# Altium PCB Final decision exp V2.PcbDoc
Units mm, origin at the board's own origin, x right, y up, seen from the top; angles counter-clockwise.
Board outline 49.4 x 66.4 mm, 2 copper layers (Top Layer, Bottom Layer); 66 components, 62 nets, 265 pads, 44 vias.
Unrouted connection lines stored in the file: 140.
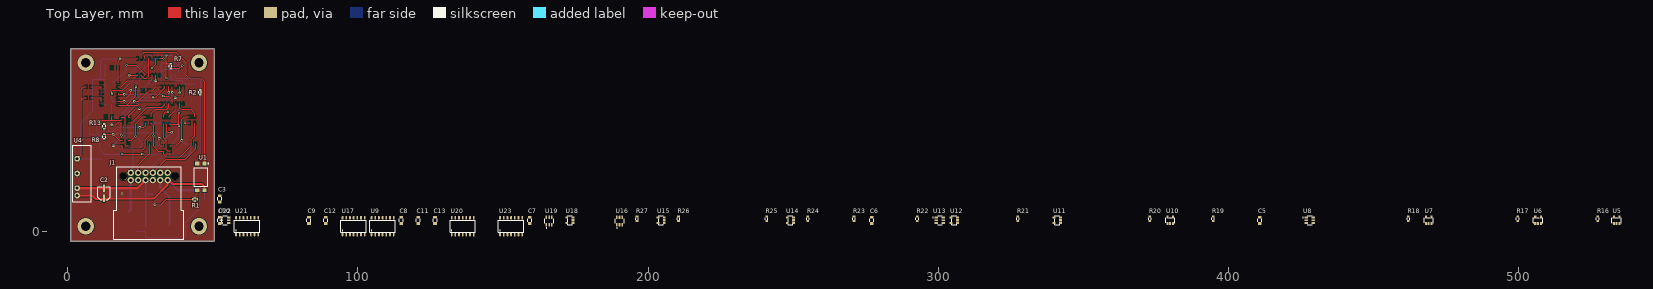
[diagram p0: Top Layer view]
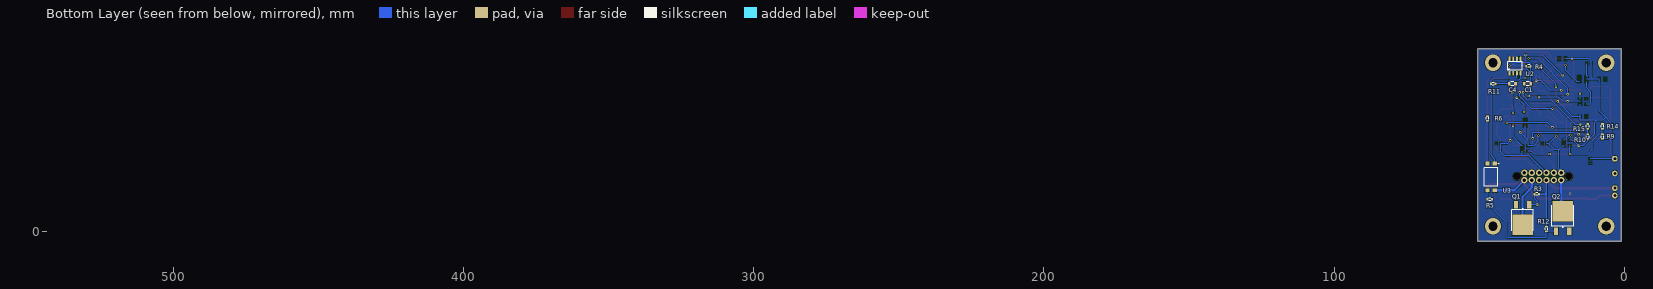
[diagram p1: Bottom Layer view, seen from below]

## Layer stack, top to bottom
Top Solder: solder mask 0.0102, Solder Resist, Dk 3.5
Top Layer: signal copper 0.0356
Dielectric 1: dielectric 0.32, FR-4, Dk 4.8
Bottom Layer: signal copper 0.0356
Bottom Solder: solder mask 0.0102, Solder Resist, Dk 3.5

## Board outline
1,-3.4 1,63 50.4,63 50.4,-3.4

## Design rules (kind name [scope] priority, off if disabled: settings)
AcuteAngle [All] p1: minimum=3.50000000000000E+0001 checktracksonly=FALSE
BoardOutlineClearance "BoardOutlineClearance 1" [All] p1: gap=0.25 ignorepadtopadclearanceinfootprint=FALSE except(0: Arc-SplitContinuation Track-SplitContinuation SMDPad-SplitContinuation THPad-SplitContinuation Via-SplitContinuation Fill-SplitContinuation Poly-SplitContinuation Region-SplitContinuation Text-SplitContinuation) // Milling
Clearance "Clearance-1 1/2 Oz" [All] p1: gap=0.125 ignorepadtopadclearanceinfootprint=FALSE except(0.2: Arc-Fill Arc-Poly Track-Fill Track-Poly SMDPad-SMDPad SMDPad-Fill SMDPad-Poly THPad-Fill THPad-Poly Via-Fill Via-Poly Fill-Fill Fill-Poly Poly-Poly Poly-Region Poly-Text; 0.25: Arc-Hole Track-Hole SMDPad-Hole THPad-Hole Via-Hole Fill-Hole Poly-Hole Region-Hole Text-Hole) // Standart
ComponentClearance [All] p1: gap=0.1 collisioncheckmode=3 verticalgap=0.1 showdistances=FALSE
DiffPairsRouting "DiffPairsRouting 1/2 Oz" [All] p1: maxlimit=0.254 minlimit=0.125 mostfreqgap=0.254 toplayer_minwidth=0.125 toplayer_maxwidth=0.381 toplayer_prefwidth=0.381 bottomlayer_minwidth=0.125 bottomlayer_maxwidth=0.381 bottomlayer_prefwidth=0.381 maxuncoupledlength=12.7
HoleSize "Minimum HoleSize" [IsPad] p1: absolutevalues=TRUE maxlimit=5.9 minlimit=0.6 maxpercent=80.000 minpercent=20.000
HoleSize "Minimum HoleSize VIA 1" [IsVia] p2: absolutevalues=TRUE maxlimit=5.9 minlimit=0.3 maxpercent=80.000 minpercent=20.000 // Standart
HoleToHoleClearance Hole2HoleClearance [All] p1: gap=0.25 allowstackedmicrovias=FALSE
MinimumAnnularRing "Minimum AR VIA Standart" [All] p1: minimumring=0.15
MinimumAnnularRing "Minimum AR PAD Standart" [All] p2: minimumring=0.2
MinimumSolderMaskSliver "SolderMask Bridge Standart" [All] p1: minsoldermaskwidth=0.15 // All Masks
PlaneClearance "PlaneClearance-1 1/2 Oz" [All] p1: clearance=0.2 // Standart
PlaneConnect "TermalConnect-1 1/2 Oz" [All] p1: planeconnectstyle=Relief reliefexpansion=0.2 reliefentries=4 reliefconductorwidth=0.2 reliefairgap=0.2 // Standart
PolygonConnect "PolygonConnect-1 1/2 Oz" [All] p1: thpad.connectstyle=Relief thpad.reliefconductorwidth=0.15 thpad.reliefentries=4 thpad.polygonreliefangle="90 Angle" thpad.airgapwidth=0.2 smdpad.connectstyle=Relief smdpad.reliefconductorwidth=0.2 smdpad.reliefentries=4 smdpad.polygonreliefangle="90 Angle" smdpad.airgapwidth=0.2 via.connectstyle=Direct via.reliefconductorwidth=0.254 via.reliefentries=4 via.polygonreliefangle="90 Angle" via.airgapwidth=0.254 // Standart
RoomDefinition Reciever [InComponentClass('Reciever')] p1: confinementstyle=ConfineIn formatcopy=TRUE lockcomponents=FALSE outline 51.5,-1.927 536.499,-1.927 536.499,8.273 51.5,8.273
RoomDefinition "Sheet1 V2" [InComponentClass('Sheet1 V2')] p2: confinementstyle=ConfineIn formatcopy=TRUE lockcomponents=FALSE outline 10.2,28.8 30.125,28.8 30.125,41.575 10.2,41.575
RoutingCorners [All] p1 off: cornerstyle=45-Degree minsetback=2.54 maxsetback=2.54
RoutingVias [All] p1: holewidth=0.4 width=0.8 viastyle="Through Hole" minholewidth=0.3 minwidth=0.6 maxholewidth=5.9 maxwidth=8.9
SilkToSilkClearance Silk2SilkClearance [All] p1 off: silktosilkclearance=0.15
SilkToSolderMaskClearance Silk2SolderMaskClearance [IsPad] p1 off: minsilkscreentomaskgap=0.15 clearancetoexposedcopper=TRUE
SolderMaskExpansion SolderMaskExpansion-1 [All] p1: expansion=0.05 istentingtop=FALSE // Standart
UnRoutedNet [All] p1: checkbadconnections=TRUE
Width [InNet('24V')] p1: maxlimit=1 minlimit=0.5 preferedwidth=0.75
Width Width_1 [InNet('GND_24V')] p2: maxlimit=1 minlimit=0.5 preferedwidth=0.75
Width "Width 1/2 Oz" [All] p3: maxlimit=10 minlimit=0.125 preferedwidth=0.254 checkconnectedcopper=TRUE
19 further rules are at their usual default settings.

## Classes and differential pairs
net class Sgn_Out[1..3]: Sgn_Out1 Sgn_Out2 Sgn_Out3
net class Sgn_In[1..3]: NetR21_2 NetR27_2 Sgn_In1
component class Reciever: C5 C6 C7 C8 C9 C10 C11 C12 C13 R16 R17 R18 R19 R20 R21 R22 R23 R24 R25 R26 R27 U5 U6 U7 U8 U9 U10 U11 U12 U13 U14 U16 U17 U18 U20 U21 U22 U23
component class "Sheet1 V2": 23 C1 C2 C3 C4 J1 J2 Q1 Q2 R1 R2 R3 R4 R5 R6 R7 R8 R9 R10 R11 R12 R13 R14 R15 U1 U2 U3 U4

## Components (designator, comment, footprint, x,y, rotation, side; value= is the part's Value field where it differs from the comment)
C1 "Cap 10nF (0805)" "0805 Capicator" 33.29,50.9 r0 bottom (schematic designator C2)
C2 "Cap Pol 4.7uF" "Bar Cap 4x5.4" 12.45,14.925 r0 top (schematic designator C1)
C3 "4.7uF" "0805 Capicator" 52.4,11.273 r90 top
C4 "Cap 10nF (0805)" "0805 Capicator" 38.575,50.9 r0 bottom
C5 "0.1uF" "0805 Capicator" 410.899,3.873 r90 top
C6 "0.1uF" "0805 Capicator" 277.099,3.873 r90 top
C7 "0.1uF" "0805 Capicator" 159.2,3.873 r90 top
C8 "0.1uF" "0805 Capicator" 114.9,3.873 r90 top (schematic designator C10)
C9 "0.1uF" "0805 Capicator" 83.1,3.873 r90 top (schematic designator C12)
C10 "0.1uF" "0805 Capicator" 52.4,3.873 r90 top (schematic designator C15)
C11 "0.1uF" "0805 Capicator" 120.8,3.873 r90 top (schematic designator C8)
C12 "0.1uF" "0805 Capicator" 88.9,3.873 r90 top (schematic designator C11)
C13 "0.1uF" "0805 Capicator" 126.6,3.873 r90 top (schematic designator C9)
J1 "Conn6x2" Conn6x2(Molex) 19.16,18.97 r0 top
Q1 "MOSFET-N" "D-Pak (TO-252AA)" 35,9.2 r0 bottom
Q2 "MOSFET-N" "D-Pak (TO-252AA)" 21.2,0.1 r180 bottom
R1 "16k" "0603 Resistor" 43.8,11.1 r180 top
R2 "1k" "0603 Resistor" 45.6,48 r270 top
R3 "8.2k" "0603 Resistor" 30.1,12.898 r0 bottom
R4 "22k" "0603 Resistor" 32.97,57 r180 bottom (schematic designator R7)
R5 "16k" "0603 Resistor" 46.34,11.08 r180 bottom (schematic designator R11)
R6 "1k" "0603 Resistor" 47.12,38.975 r270 bottom (schematic designator R12)
R7 "5.6" "0603 Resistor" 35.441,57 r270 top (schematic designator R13)
R8 "1k" "0603 Resistor" 12.55,32.72 r90 top (schematic designator R4)
R9 "2k" "0603 RESISTOR" 7.475,32.72 r270 bottom (schematic designator R5)
R10 "3k" "0603 RESISTOR" 12.55,32.72 r270 bottom (schematic designator R6)
R11 "22k" "0603 Resistor" 45.1,50.9 r0 bottom (schematic designator R14)
R12 "8.2k" "0603 Resistor" 26.78,0.88 r270 bottom (schematic designator R15)
R13 "3k9" "0603 RESISTOR" 12.55,36.24 r270 top (schematic designator R8)
R14 "3k" "0603 RESISTOR" 7.475,36.24 r270 bottom (schematic designator R9)
R15 "2k" "0603 Resistor" 12.55,36.24 r270 bottom (schematic designator R10)
R16 "1k" "0603 Resistor" 527.399,4.373 r90 top
R17 "1k" "0603 Resistor" 499.799,4.373 r90 top
R18 "1k" "0603 Resistor" 462.099,4.373 r90 top
R19 "1k" "0603 Resistor" 394.799,4.373 r90 top
R20 "1k" "0603 Resistor" 372.999,4.373 r90 top
R21 "1k" "0603 Resistor" 327.499,4.373 r90 top
R22 "10k" "0603 Resistor" 292.799,4.373 r90 top
R23 "10k" "0603 Resistor" 270.999,4.373 r90 top
R24 "10k" "0603 Resistor" 255.099,4.373 r90 top
R25 "1k" "0603 Resistor" 240.899,4.373 r90 top
R26 "10k" "0603 Resistor" 210.5,4.373 r90 top
R27 "1k" "0603 Resistor" 196.2,4.373 r90 top
U1 "Opt" FAIR-MDIP-4_V 45.85,18.8 r270 top
U2 "NE555P" SOIC-8 39.52,54.55 r90 bottom (schematic designator U3)
U3 "Opt" FAIR-MDIP-4_V 45.85,18.8 r270 bottom (schematic designator U4)
U4 "DC/DC" SIP7 3.225,12.385 r180 top (schematic designator U2)
U5 "Comparator" SOT-23-5 533.899,2.773 r0 top
U6 "Comparator" SOT-23-5 506.799,2.773 r0 top (schematic designator U8)
U7 "Comparator" SOT-23-5 469.099,2.773 r0 top (schematic designator U10)
U8 "Inv" SOT236 428.099,3.873 r0 top (schematic designator U6)
U9 "2AND" SOIC-14 104.7,-1.027 r0 top (schematic designator U7)
U10 "Comparator" SOT-23-5 379.999,2.773 r0 top (schematic designator U12)
U11 "Comparator" SOT-23-5 342.199,3.873 r90 top (schematic designator U16)
U12 "Comparator" SOT-23-5 306.699,3.873 r90 top (schematic designator U18)
U13 "Inv" SOT236 300.599,3.873 r0 top
U14 "Comparator" SOT-23-5 250.199,3.873 r90 top (schematic designator U20)
U15 "Comparator" SOT-23-5 205.6,3.873 r90 top (schematic designator U22)
U16 "Inv" SOT236 190.2,3.573 r90 top (schematic designator U21)
U17 "2AND" SOIC-14 94.7,-1.027 r0 top (schematic designator U14)
U18 "Comparator" SOT-23-5 174.2,3.873 r90 top (schematic designator U23)
U19 "Inv" SOT236 165.9,3.573 r90 top (schematic designator U17)
U20 "4AND" SOIC-14 132.3,-1.027 r0 top (schematic designator U11)
U21 "4AND" SOIC-14 58,-1.027 r0 top (schematic designator U15)
U22 "Inv" SOT236 54.2,3.873 r0 top (schematic designator U19)
U23 "2XOR" SOIC-14 149,-1.027 r0 top (schematic designator U9)

## Footprints (in the part's own frame and the unit in brackets; to place one, negate y for a bottom-side part, rotate by r counter-clockwise, add the part's x,y. Pads: shape width x height; smd on the part's side, far side on the other; paste and mask are expansions set on the pad)
"0603 Resistor" [mm]
  rect 0.6x0.9 smd: 1(-0.78,0) 2(0.78,0)
  silkscreen extent -0.35,-0.45 0.35,0.45, body extent -0.85,-0.45 0.85,0.45, height 0.55
"0603 RESISTOR" [mm]
  rect 0.6x0.9 smd: 1(-0.78,0) 2(0.78,0)
  silkscreen extent -0.35,-0.45 0.35,0.45, body extent -0.85,-0.45 0.85,0.45, height 0.55
"0805 Capicator" [mm]
  rect 0.9x1.3 smd: 1(-1.1,0) 2(1.1,0)
  silkscreen extent -0.53,-0.67 0.53,0.67, body extent -1.05,-0.67 1.05,0.68, height 0.75
"Bar Cap 4x5.4" [mm]
  rect 0.8x2.5 smd: 1(0,0) 2(0,-3.5)
  silkscreen extent -2.2,-4 2.25,0.43, body extent -2.15,-4.3 2.15,0.7, height 5.4
Conn6x2(Molex) [mm]
  round 2.2 hole 1.2: 1(2.54,1.27) 2(5.08,1.27) 3(7.62,1.27) 4(10.16,1.27) 5(12.7,1.27) 6(15.24,1.27) 7(2.54,-1.27) 8(5.08,-1.27) 9(7.62,-1.27) 10(10.16,-1.27) 11(12.7,-1.27) 12(15.24,-1.27)
  round 2.6 hole 2.6 unplated: A(0,0) A(17.78,0)
  silkscreen extent -3.25,-21.63 20.87,3.37, body extent -3.15,-31.93 20.79,3.23, height 22.06
"D-Pak (TO-252AA)" [mm]
  rect 1.5x2.5 smd: 1(-2.3,0) 3(2.3,0)
  rect 7x7 smd: 2(0,6.9)
  silkscreen extent -3.72,1.02 3.75,8.87, body extent -3.38,-0.65 3.35,9.45, height 2.37
FAIR-MDIP-4_V [mm]
  rect 1.3x1.5 smd: 1(-4.6,1.27) 2(-4.6,-1.27) 3(4.6,-1.27) 4(4.6,1.27)
  silkscreen extent -4.72,-2.3 3.25,2.7, body extent -5.08,-2.3 5.08,2.3, height 3.85
SIP7 [mm]
  round 2 hole 1: 1(0,0) 2(0,-2.54) 4(0,-7.62) 6(0,-12.7)
  silkscreen extent -4.77,-17.35 1.45,2.1, body extent -4.7,-17.27 1.39,2.03, height 10.16
SOIC-8 [mm]
  oval 1.6x0.65 smd: 1(0,0) 2(0,-1.27) 3(0,-2.54) 4(0,-3.81) 5(5,-3.81) 6(5,-2.54) 7(5,-1.27) 8(5,0)
  silkscreen extent 1.1,-4.35 3.9,0.55, body extent -0.36,-4.35 5.41,0.55, height 1.45
SOIC-14 [mm]
  oval 0.6x1.3 smd paste+0 mask+0.1: 1(0,0) 2(1.27,0) 3(2.54,0) 4(3.81,0) 5(5.08,0) 6(6.35,0) 7(7.62,0) 8(7.62,5.75) 9(6.35,5.75) 10(5.08,5.75) 11(3.81,5.75) 12(2.54,5.75) 13(1.27,5.75) 14(0,5.75)
  silkscreen extent -0.55,0.82 8.15,4.92, body extent -0.52,-0.12 8.13,5.87, height 1.75
SOT236 [mm]
  rrect25% 1.21x0.58 smd: 1(-1.255,0.95) 2(-1.255,0) 3(-1.255,-0.95) 4(1.255,-0.95) 5(1.255,0) 6(1.255,0.95)
  silkscreen extent -2.4,-1.56 0.8,1.56, body extent -1.4,-1.45 1.4,1.45, height 1.45
SOT-23-5 [mm]
  rect 0.7x1 smd mask+0.045: 1(-0.95,0) 2(0,0) 3(0.95,0) 4(0.95,2.2) 5(-0.95,2.2)
  silkscreen extent -1.6,0.3 1.6,1.92, body extent -1.5,-0.15 1.5,2.35, height 1.1

## Part data
C1 C4: library part CMP-020-0006-1, "0805 X7R 10nF 100V 10%", Manufacturer="Murata Manufacturing", Part Number=GRM21BR72A103KA01L, Component Type=Standard, ComponentLink1Description=Chip&Dip, ComponentLink1URL=https://www.chipdip.ru/product/grm21br72a103ka01l, Design Item ID="Cap 10nF (0805)", Pins=2, Source=Karen_Components.SchLib, Type=Capacitor
C2: library part CMP-020-0029-1, "ECAP SMD,  35V, 105°C", Manufacturer=Epcos, Part Number=B41121A7475M000, Component Type=Standard, ComponentLink1Description=Chip&Dip, ComponentLink1URL=https://www.chipdip.ru/product/b41121a7475m000, Design Item ID="Cap Pol 4.7uF", Pins=2, Source=Karen_Components.SchLib, Type=Capacitor
C3: library part "Cap 4.7uF (0805)", "4.7uF X5R 10% 25V 0805", Manufacturer="Murata Manufacturing", Part Number=GRM21BR61E475KA12L, ComponentLink1Description=Chip&Dip, ComponentLink1URL=https://www.chipdip.ru/product/grm21br61e475ka12l, Type=Capacitor
C5 C6 C7 C8 C9 C10 C11 C12 C13: library part "Cap 0.1uF (0805)", "0.1uF X7R 50V 10% 0805", Manufacturer="Murata Manufacturing", Part Number=GRM21BR71E104KA01L, ComponentLink1Description=Chip&Dip, ComponentLink1URL=https://www.chipdip.ru/product/grm21br71e104ka01l, Type=Capacitor
J1: library part "Conn 12 [Stack64]", "Stac64 Right-Angle Header Assembly, 12 Circuits, Polarization A, Black, Tray / Current - Maximum per Contact 10.0A / Voltage - Maximum 500V", ComponentLink1Description=Molex, ComponentLink1URL=https://www.molex.com/molex/products/part-detail/pcb_headers/0346910120, ComponentLink2Description=DataSheet, ComponentLink2URL=https://www.molex.com/webdocs/datasheets/pdf/en-us/0346910120_PCB_HEADERS.pdf
Q1 Q2: library part "MOSFET-N [IRLR]", "Trans MOSFET N-CH Si 55V 89A 3-Pin(2+Tab) DPAK Tube", Manufacturer="International Rectifier", Part Number=IRLR3705ZTRPBF, ComponentLink1Description=DataSheet, ComponentLink1URL=https://static.chipdip.ru/lib/292/DOC000292789.pdf, ComponentLink2Description=Chip&Dip, ComponentLink2URL=https://www.chipdip.ru/product/irlr3705zpbf, Type=Transistor
R1 R5: library part "Res 16k (0603)", "0.1W 0603 16k, 1%", Manufacturer=Taiwan, Part Number=RC0603FR-0716KL, ComponentLink1Description=Chip&Dip, ComponentLink1URL=https://www.chipdip.ru/product0/9000079741, ComponentLink2Description=Datasheet, ComponentLink2URL=https://static.chipdip.ru/lib/788/DOC004788200.pdf
R2 R6 R8 R16 R17 R18 R19 R20 R21 R25 R27: library part "Res 1k (0603)", "0.1W 0603 1k, 1%", Manufacturer=Taiwan, Part Number=RC0603FR-071KL, ComponentLink1Description=Chip&Dip, ComponentLink1URL=https://www.chipdip.ru/product0/9000079676, Type=Resistor
R3 R12: library part "Res 8.2k (0603)", "0.1W 0603 8.2k, 1%", Manufacturer=Taiwan, Part Number=RC0603FR-078R2L, ComponentLink1Description=Chip&Dip, ComponentLink1URL=https://www.chipdip.ru/product0/9000079556, ComponentLink2Description=Datasheet, ComponentLink2URL=ttps://static.chipdip.ru/lib/788/DOC004788200.pdf
R4 R11: library part "Res 22k (0.1W 0603 22k, 1%)", "0.1W 0603 22k, 1%"
R7: library part "Res 5.6k (0.1W 0603 5.6k, 1%)", "0.1W 0603 5.6k, 1%"
R9 R15: library part "Res 2k (0603)", "0.1W 0603 2k, 1%", Manufacturer=Taiwan, Part Number=RC0603FR-072KL, ComponentLink1Description=Chip&Dip, ComponentLink1URL=https://www.chipdip.ru/product0/9000079719, Type=Resistor
R10 R14: library part "Res 3k (0603)", "0.1W 0603 3k, 1%", Manufacturer=Taiwan, Part Number=RC0603FR-073KL, ComponentLink1Description=Chip&Dip, ComponentLink1URL=https://www.chipdip.ru/product0/9000079723, Type=Resistor
R13: library part "Res 3.9k (0603)", "0.1W 0603 3.9k, 1%", Manufacturer=Taiwan, Part Number=RC0603FR-073K9L, ComponentLink1Description=Chip&Dip, ComponentLink1URL=https://www.chipdip.ru/product0/9000079726, Type=Resistor
R22 R23 R24 R26: library part "Res 10k (0603)", "0.1W 0603 10k, 1%", Manufacturer=Taiwan, Part Number=RC0603FR-0710KL, ComponentLink1Description=Chip&Dip, ComponentLink1URL=https://www.chipdip.ru/product0/9000079736, Type=Resistor
U1 U3: library part "Optocoupler [FOD817B]", "Phototransistor Optocoupler, 4 us Rise, 3 us Fall, 5000 Vrms, -55 to 110 degC, 4-Pin MDIP, RoHS, Tape and Reel", Manufacturer="ON Semiconductor", Part Nomber=FOD817B, ComponentLink1Description=Chip&Dip, ComponentLink1URL=https://www.chipdip.ru/product/fod817b, ComponentLink2Description=DataSheet, ComponentLink2URL=https://static.chipdip.ru/lib/297/DOC000297284.pdf
U2: "Standard Timer Single 8-Pin PDIP Tube", Case/Package=PDIP, Current Rating=10mA, Frequency=500kHz, High Level Output Current=-200mA, Low Level Output Current=200mA, Manufacturer="Texas Instruments", Max Operating Temperature=70°C, Max Supply Voltage=16V, Min Operating Temperature=0°C, Min Supply Voltage=4.5V, Nominal Supply Current=2mA, Operating Supply Voltage=5V, Package Quantity=50, Quiescent Current=15mA, Category="Clock and Timing", ComponentLink1Description=https://datasheet.ciiva.com/1139/sa555-1139904.pdf?src-supplier=Element14, ComponentLink1URL=https://datasheet.ciiva.com/1139/sa555-1139904.pdf?src-supplier=Element14, ComponentLink2Description=https://datasheet.ciiva.com/19457/904085-19457361.pdf?src-supplier=Jameco, ComponentLink2URL=https://datasheet.ciiva.com/19457/904085-19457361.pdf?src-supplier=Jameco, ComponentLink3Description=https://datasheet.ciiva.com/26325/152184-da-01-en-ne555p-timer-tid-26325915.pdf?src-supplier=Conrad, ComponentLink3URL=https://datasheet.ciiva.com/26325/152184-da-01-en-ne555p-timer-tid-26325915.pdf?src-supplier=Conrad, ComponentLink4Description=https://datasheet.ciiva.com/1147/1764032-1147750.pdf?src-supplier=Newark, ComponentLink4URL=https://datasheet.ciiva.com/1147/1764032-1147750.pdf?src-supplier=Newark, ComponentLink5Description=https://datasheet.ciiva.com/14094/ne555-series-eng-tds-14094950.pdf?src-supplier=Distrelec, ComponentLink5URL=https://datasheet.ciiva.com/14094/ne555-series-eng-tds-14094950.pdf?src-supplier=Distrelec, ComponentLink6Description=https://datasheet.ciiva.com/14274/ne555-14274456.pdf?src-supplier=Avnet, ComponentLink6URL=https://datasheet.ciiva.com/14274/ne555-14274456.pdf?src-supplier=Avnet, ComponentLink7Description=https://datasheet.ciiva.com/15152/getdatasheetpartid-248510-15152620.pdf?src-supplier=Verical, ComponentLink7URL=https://datasheet.ciiva.com/15152/getdatasheetpartid-248510-15152620.pdf?src-supplier=Verical, ComponentLink8Description=https://datasheet.ciiva.com/1233/ne555-1233454.pdf?src-supplier=Digi-Key, ComponentLink8URL=https://datasheet.ciiva.com/1233/ne555-1233454.pdf?src-supplier=Digi-Key, ComponentLink9Description=https://datasheet.ciiva.com/26228/ne555-26228892.pdf?src-supplier=Avnet+Europe, ComponentLink9URL=https://datasheet.ciiva.com/26228/ne555-26228892.pdf?src-supplier=Avnet+Europe, Contact Plating=Gold, Height=4.57mm, Lead Free="Lead Free", Length=9.81mm, Manufacturer Part Number=NE555P, Mount=SMD, Number of Pins=8, Number of Timers/Counters=1, Operating Supply Current=10mA, Packaging=Rail/Tube, Pricing 1="1=0,37000, 10=0,29900, 25=0,27360, 100=0,20350, 250=0,18444, 500=0,15264, 1000=0,11448, 2500=0,10494, 5000=0,10020 (USD)", Radiation Hardening=No, REACH SVHC="No SVHC", RoHS=Yes, RoHS Compliant=Yes, Supplier 1=Digi-Key, Weight=0.015535oz, Width=6.35mm
U4: library part "DC/DC Isolated 5V [TMH]", "The TMH series are ultra miniature, isolated 2 Watt DC/DC-converters in a Single-in-Line  package  (SIP)", Manufacturer="Traco Power", Part Number=TMH2405S, ComponentLink1Description=Chip&Dip, ComponentLink1URL=https://www.chipdip.ru/product/tmh-2405s, ComponentLink2Description=DataSheet, ComponentLink2URL=https://static.chipdip.ru/lib/005/DOC001005854.pdf, Type=IC
U5 U6 U7 U10 U11 U12 U14 U15 U18: library part "Comparator [LMV]", "LMV7219 7-ns 2.7-V to 5-V Comparator with Rail-to-Rail Output", Manufacturer="Texas Instruments", Part Number=LMV7219M5X/NOPB, ComponentLink1Description=DataSheet, ComponentLink1URL=http://www.ti.com/lit/ds/symlink/lmv7219.pdf, ComponentLink2Description=Mouser, ComponentLink2URL=https://ru.mouser.com/ProductDetail/Texas-Instruments/LMV7219M5X-NOPB?qs=sGAEpiMZZMuayl%2FEk2kXcbEcxwmoPguctVQUIBgrLJY%3D, Type=IC
U8 U13 U16 U19: library part Inverter, Chip&Dip=https://www.chipdip.ru/product/sn74lvc2g04dbvr-2
U9 U17: library part "4 (2AND)", "4 (2AND)", Chip&Dip=https://www.chipdip.ru/product/sn74ac08dr
U20: library part "2 (4AND)", "2 (4AND)", Chip&Dip=https://www.chipdip.ru/product/74hc21d.653
U21: library part "2 (4NOR)", "2 (4NOR)", Chip&Dip=https://www.chipdip.ru/product/74hc4002d
U22: library part Inverter, "Inverter", Chip&Dip=https://www.chipdip.ru/product/sn74lvc2g04dbvr-2
U23: library part "4 (2XOR)", Chip&Dip=https://www.chipdip.ru/product/74hc86d

## Via types
v1: diameter 0.8, hole 0.4, Top Layer to Bottom Layer, 40 vias
v2: diameter 5.6, hole 3.2, Top Layer to Bottom Layer, 4 vias

## Nets (pads, with @x,y where several pads share a name; then routed paths per layer and width w, separated by ;. In a path a pad name is that pad's centre, name@x,y a point inside that pad or via, vN(x,y) a via of type N, cw(c..) or ccw(c..) an arc to the next point about the centre after c; other vN are vias at no path point)
2V: R10.1 R15.2 U7.4 U12.4 U18.4 | length 35.7
  Top Layer w0.254: v1(24.804,35.9) 26.179,35.9 26.8,36.521 26.8,37.375 ; v1(40.369,37.459) 41.836,37.459 41.9,37.395
  Bottom Layer w0.254: R10.1 12.55,34.48 ; R15.2 12.55,34.48 ; v1(40.369,37.459) 26.363,37.459 v1(24.804,35.9) 17,35.9 15.58,34.48 12.55,34.48
2V_Comp1: U7.1 U9.5
2V_Comp2: U12.1 U17.13
2V_Comp3: U17.5 U18.1
3V: R9.1 R14.2 U6.4 U11.4 U15.4 | length 35.3
  Top Layer w0.254: v1(18.7,26.7) v1(25.7,26.7)
  Bottom Layer w0.254: R14.2 R9.1 8.713,33.5 11,31.213 11,28.3 12.6,26.7 v1(18.7,26.7) 18.7,29.6 ; v1(25.7,26.7) 30.9,26.7 31.9,27.7 33,27.7
3V_Comp1: U6.1 U8.3 U9.2
3V_Comp2: U11.1 U13.3 U17.10
3V_Comp3: U15.1 U16.3 U17.2
3V_Comp(Inv)1: U8.4 U9.4
3V_Comp(Inv)2: U13.4 U17.12
3V_Comp(Inv)3: U16.4 U17.4
4V: R8.2 R13.2 U5.4 U10.4 U14.4 | length 30.7
  Top Layer w0.254: R13.2 R8.2 v1(15.669,33.5) 17.669,31.5 18.7,31.5 ; v1(31.5,32.1) 31.5,30 31.9,29.6 33,29.6
  Bottom Layer w0.254: v1(15.669,33.5) 16.85,33.5 17.45,34.1 31.351,34.1 31.5,33.951 v1(31.5,32.1)
4V_Comp(Inv)1: U8.6 U9.1
4V_Comp(Inv)2: U13.6 U17.9
4V_Comp(Inv)3: U16.6 U17.1
5V: C3.2 C5.1 C6.1 C7.1 C8.1 C9.1 C10.1 C11.1 C12.1 C13.1 R8.1 R9.2 R10.2 R16.2 R18.1 R19.2 R20.2 R22.1 R25.2 U4.6 U5.5 U6.5 U7.5 U8.2 U9.7 U10.5 U11.5 U12.5 U13.2 U14.5 U15.5 U17.7 U18.5 U19.2 U20.7 U21.7 U22.2 U23.7 | length 253.7
  Top Layer w0.254: U4.6 4.625,26.485 4.625,31.151 ; 6.35,46.13 5.539,46.13 4.625,45.216 ; 6.35,49.94 6.28,49.94 5.539,49.94 4.625,49.026 4.625,45.216 ; R8.1 9.69,31.94 ; 15.225,39.6 15.225,38.568 15.375,38.418 ; v1(15.609,29.6) 18.7,29.6 18.7,28.6 19.1,28.2 25.85,28.2 26.72,29.07 26.72,30.3 26.72,31.695 29.446,34.421 ; 17.325,51.21 17.325,56.375 17.3,56.4 17.3,58.819 v1(17.995,59.514) 18.063,59.582 23.952,59.582 24.02,59.65 ; 18.495,38.418 15.375,38.418 ; v1(22.925,44.85) 24.2,44.85 27.427,48.077 27.677,48.077 27.95,48.35 27.95,48.6 ; 28,48.6 27.95,48.6 ; 28.7,37.375 28.7,37.225 29.55,36.375 v1(29.55,33.025) 29.55,29.329 31.179,27.7 33,27.7 33,26.6 33.8,25.8 38.8,25.8 42.52,29.52 42.52,30.3 42.45,30.3 ; 32.22,49.825 30.34,49.825 29.115,48.6 27.95,48.6 ; 33.95,36.945 33.95,36.8 34.025,36.725 34.025,34.363 34.174,34.214 v1(35.795,34.214) ; 42.45,30.3 42.52,30.37 42.52,31.8 43.8,33.08 43.8,37.395 ; 4.625,31.151 4.625,45.216 ; 4.625,31.151 5.414,31.94 9.69,31.94 ; 9.69,31.94 10.4,32.65 10.4,37.22 11.45,38.27 15.226,38.27 15.375,38.418
  Bottom Layer w0.254: U4.6 U4.6@3.226,25.084 ; R9.2 5.189,31.94 4.4,31.151 ; 11.315,57.9 11.315,53.175 10.64,52.5 ; 11.315,57.9 11.385,57.9 11.385,58.785 12.114,59.514 v1(17.995,59.514) 20.186,59.514 20.2,59.5 ; 11.67,25.08 11.668,25.082 3.227,25.082 U4.6@3.226,25.084 ; R10.2@12.55,31.87 12.55,31.25 14.2,29.6 v1(15.609,29.6) 17.509,31.5 18.7,31.5 ; R10.2 11.86,31.94 10.1,33.7 10.1,37.7 9.53,38.27 ; 12.945,52.5 10.64,52.5 ; 15.225,43.91 15.225,39.6 15.2,39.575 ; v1(22.925,44.85) 17.65,39.575 15.2,39.575 ; v1(29.55,33.025) 29.55,31.229 31.179,29.6 32.85,29.6 33,29.75 33,31.229 34.025,32.254 34.025,32.444 ; 34.025,36.359 34.025,32.444 ; v1(35.795,34.214) 34.025,32.444 ; U4.6@3.226,25.084 U4.6 4.4,26.26 4.4,31.151 ; 4.4,31.151 4.4,37.325 6.385,39.31 ; 6.385,39.31 8.65,41.575 8.65,52.5 8.7,52.5 10.64,52.5 ; 6.385,39.31 7.425,38.27 9.53,38.27 ; 9.53,38.27 15.026,38.27 15.175,38.418 15.175,39.55 15.2,39.575
24V: C2.2 J1.12 U1.4 U3.4 U4.1 | length 61.9
  Top Layer w0.75: U4.1 8.415,12.385 9.6,11.2 12.425,11.2 12.45,11.225 C2.2@12.45,11.325 ; C2.2 C2.2@12.45,11.325 ; U1.4 47.12,15.361 46.119,16.362 36.13,16.362 34.792,17.7 J1.12 34.372,17.672 34.372,16.081 29.616,11.325 C2.2@12.45,11.325
  Bottom Layer w0.75: J1.12 37.9,14.2 U3.4
GND: C1.2 C3.1 C4.1 C5.2 C6.2 C7.2 C8.2 C9.2 C10.2 C11.2 C12.2 C13.2 Q1.3 Q2.3 R2.1 R6.1 R13.1 R14.1 R15.1 R17.1 R21.1 R23.2 R24.2 R26.2 R27.1 U2.1 U4.4 U5.2 U6.2 U7.2 U8.5 U9.14 U10.2 U11.2 U12.2 U13.5 U14.2 U15.2 U17.14 U18.2 U19.5 U20.14 U21.5 U21.14 U22.5 U23.14 | length 0.2
  Bottom Layer w0.254: U4.4 U4.4@3.283,20.062 ; R6.1 R6.1@47.12,39.825
  other v1: 18.7,13
GND_24V: C2.1 J1.9 R3.1 R12.1 U4.2 | length 43.4
  Top Layer w0.75: U4.2 C2.1 24.005,14.925 J1.9
  Bottom Layer w0.5: R12.1@26.78,1.73 26.78,13.348 ; J1.9 26.78,13.348 ; R3.1 27.23,12.898 26.78,13.348
Green_On1: U9.6 U20.10 U23.4
Green_On2: U17.11 U20.12 U23.1
Green_On3: U17.6 U20.13 U23.9
GREEN_SIGNAL: U1.1 U9.8 | length 58.5
  Top Layer w0.254: 25.29,59.65 25.29,61.015 26.125,61.85 37.18,61.85 40.9,58.13 40.9,53.9 42.2,52.6 46.2,52.6 47.12,51.68 U1.1
LED_GREEN: J1.11 Q1.2 | length 16.7
  Bottom Layer w0.75: J1.11 31.86,17.423 31.86,15.14 35,12 Q1.2
LED_RED: J1.7 Q2.2 | length 10.9
  Bottom Layer w0.75: Q2.2 21.7,7.5 J1.7
NetC1_1: C1.1 R4.2 U2.2 U2.6 | length 20.9
  Bottom Layer w0.254: C1.1 32.19,54.752 ; U2.6 36.98,58.28 36.8,58.1 32.574,58.1 32.19,57.716 R4.2 32.19,54.752 ; U2.2 38.25,55.7 38.05,55.9 33.338,55.9 32.19,54.752
NetQ2_1: Q2.1 R5.2 R12.2 | length 34.2
  Bottom Layer w0.254: Q2.1 R12.2 26.78,-1.8 27,-2.02 27,-2.051 27.149,-2.2 40.105,-2.2 40.7,-1.605 40.7,3.2 45.56,8.06 R5.2
NetR1_1: R1.1 U1.3 | length 3.1
  Top Layer w0.254: R1.1 U1.3
NetR2_2: R2.2 U1.2 | length 24.2
  Top Layer w0.254: U1.2 44.58,24.9 45.6,25.92 R2.2
NetR4_1: R4.1 R7.2 U2.7 | length 12.5
  Top Layer w0.254: R7.2 38.47,56.22 v1(39.448,57.2)
  Bottom Layer w0.254: R4.1 37.6,57 38.25,57.65 ; U2.7 38.25,57.65 ; v1(39.448,57.2) 39.447,57.198 38.701,57.198 38.25,57.65
NetR5_1: R5.1 U3.3 | length 3.1
  Bottom Layer w0.254: R5.1 U3.3
NetR6_2: R6.2 U3.2 | length 14.8
  Bottom Layer w0.254: U3.2 R6.2
NetR18_2: R18.2 U20.1
NetR19_1: R19.1 U20.9
NetR21_2: R21.2 U10.3 U11.3 U12.3
NetR22_2: R22.2 U21.9 U21.10 U21.11 U21.12 U22.3 U23.12 U23.13
NetR23_1: R23.1 U21.13
NetR24_1: R24.1 U23.11
NetR26_1: R26.1 U22.4
NetR27_2: R27.2 U14.3 U15.3 U18.3
NetU5_1: U5.1 U8.1
NetU9_9: U9.9 U9.12 U20.6
NetU9_10: U9.10 U20.8
NetU9_13: U9.13 U22.6
NetU10_1: U10.1 U13.1
NetU14_1: U14.1 U16.1
NetU20_2: U20.2 U23.8
NetU20_4: U20.4 U23.6
NetU20_5: U20.5 U23.3
NetU21_1: U21.1 U22.1
Out_Low: Q1.1 R1.2 R3.2 | length 20.5
  Top Layer w0.254: v1(30,9.2) 32.002,9.2 33.902,11.1 R1.2 R1.2@42.985,11.065
  Bottom Layer w0.254: R3.2 30.88,11.325 30,10.445 v1(30,9.2) 32.46,9.2 Q1.1@32.58,9.32
RED_Final: C4.2 R7.1 R11.1 U2.4 U2.8 U9.11 | length 48.1
  Top Layer w0.254: v1(21.195,53.914) 21.202,53.907 24.013,53.907 24.02,53.9 ; v1(34.012,52.89) 34.012,58.1 ; v1(34.012,60.8) 34.012,58.1 ; R7.1 34.332,57.78 34.012,58.1
  Bottom Layer w0.254: v1(21.195,53.914) 28.081,60.8 v1(34.012,60.8) 39.371,60.8 39.52,60.651 U2.8 ; v1(34.012,52.89) 35.71,52.89 ; U2.4 35.71,52.89 ; R11.1 39.625,50.9 C4.2 39.675,51.825 39.3,52.2 36.4,52.2 35.71,52.89
Red_On1: U9.3 U21.2 U23.5
Red_On2: U17.8 U21.3 U23.2
Red_On3: U17.3 U21.4 U23.10
RED_SIGNAL: R11.2 U2.3 U3.1 | length 40
  Bottom Layer w0.254: U2.3 36.98,53.21 37.3,52.89 45.16,52.89 45.88,52.17 R11.2 45.88,26.2 44.58,24.9 U3.1
Sgn_In1: J1.3 R17.2 U5.3 U6.3 U7.3 | length 42
  Top Layer w0.254: 35.2,29.6 37.427,29.6 39.227,31.4 v1(39.245,31.4) 39.245,38.759 40.081,39.595 41.9,39.595 41.898,39.597
  Bottom Layer w0.254: J1.3 32.685,26.145 35.2,26.145 ; 35.2,27.7 35.2,26.145 ; v1(39.245,31.4) 40.345,30.3 42.52,30.3 42.52,27.52 41.145,26.145 35.2,26.145
Sgn_In2: J1.1 | length 31.1
  Top Layer w0.254: 20.9,31.5 21.93,31.5 23.263,32.833 v1(23.339,32.833) 23.339,37.144 25.77,39.575 26.8,39.575
  Bottom Layer w0.254: 20.9,29.6 21.05,29.6 22.477,28.173 ; J1.1 21.7,20.767 22.477,21.544 22.477,28.173 ; v1(23.339,32.833) 23.467,32.833 26,30.3 ; 26.65,30.23 26.72,30.3 26,30.3 ; 22.477,28.173 23.873,28.173 26,30.3
Sgn_In3: J1.5
Sgn_Out1: J1.4 R16.1 | length 20
  Top Layer w0.254: J1.4 33.98,24.9 40.525,24.9 44.08,28.455 44.08,30.3
Sgn_Out2: J1.2 R20.1 | length 11.7
  Top Layer w0.254: J1.2 24.24,22.957 28.28,26.997 28.28,30.3
Sgn_Out3: J1.6 R25.1
pads on no net: J1.8 J1.10 J1.A U2.5 U16.2 U16.5 U19.1 U19.3 U19.4 U19.6 U20.3 U20.11 U21.6 U21.8
copper on no net: | length 375.9
  Top Layer w0.254: 7.91,46.13 11.525,46.13 11.55,46.105 11.575,46.13 11.575,44.86 ; 7.91,49.94 9.43,49.94 11.575,49.94 11.575,48.67 ; v1(15.175,36.749) 16.449,36.749 17.168,37.468 18.495,37.468 18.35,37.323 18.495,37.178 v1(18.495,33.2) ; v1(15.225,47.428) 15.225,48.501 15.374,48.65 17.305,48.65 17.325,48.67 17.345,48.65 18.925,48.65 21.5,51.225 36.975,51.225 37.3,50.9 37.3,49.825 ; 17.325,46.13 20.33,46.13 21.7,47.5 v1(21.7,48.67) ; 17.325,47.4 17.353,47.428 17.455,47.325 v1(19.475,47.325) ; 17.325,49.94 18.49,49.94 20.55,52 28.651,52 29.1,52.449 29.1,53.9 ; 17.391,44.926 17.325,44.86 v1(19.475,44.86) ; 17.568,43.59 20.33,43.59 ; 18.495,39.368 19.482,39.368 19.75,39.1 19.75,29.95 20.1,29.6 20.9,29.6 ; v1(20.2,57.3) 23.51,57.3 26.56,54.25 26.56,53.9 ; 21.005,37.468 21.991,37.468 27.333,42.81 32.575,42.81 33.49,43.725 33.49,44.075 ; 21.447,39.531 21.284,39.368 21.005,39.368 21.005,39.93 23.425,42.35 v1(24.675,42.35) ; v1(23.47,49.94) 23.47,46.73 20.33,43.59 ; 25.29,53.9 25.29,53.61 26.1,52.8 27.08,52.8 27.83,53.55 27.83,53.9 27.83,59.65 ; 26.56,59.65 26.56,60.56 27,61 28.8,61 29.1,60.7 29.1,59.65 ; 28.7,39.575 28.7,40.725 30.05,42.075 34.025,42.075 34.76,42.81 34.76,44.075 ; v1(29.001,56.35) 30.368,57.716 30.368,59.648 30.37,59.65 ; v1(29.375,46.325) 30.34,46.325 33.49,49.475 33.49,49.825 ; v1(30.34,52) 30.355,52.015 30.355,53.885 30.37,53.9 ; 31.638,59.652 31.64,59.65 31.641,59.649 v1(32.983,59.649) ; 32.22,44.075 24.7,44.075 24.215,43.59 20.33,43.59 ; v1(32.925,46.675) 34.725,46.675 36.03,45.37 36.03,44.075 ; 33,36.945 33,32.229 34,31.229 34,28.1 34.3,27.8 35.1,27.8 35.2,27.7 ; 33,39.455 33,40.487 33.713,41.2 v1(34.5,41.2) ; 34.76,49.825 34.767,49.818 34.767,48.008 v1(34.775,48) ; 34.9,36.945 37.848,36.945 v1(38.3,36.493) v1(38.3,40.85) ; 34.9,39.455 34.9,39.77 37.3,42.17 37.3,44.075 37.338,44.037 ; v1(36.03,47.95) 36.03,49.825 ; v1(37,46.15) 39.05,46.15 39.84,46.94 39.84,49.825 ; 38.57,44.075 38.57,42.555 39.05,42.075 42.325,42.075 43.8,40.6 43.8,39.595 ; 38.57,49.825 38.573,49.822 v1(38.572,47.775)
  Bottom Layer w0.254: 11.613,23.463 11.67,23.52 ; 12.539,53.613 12.702,53.45 12.945,53.45 12.945,57.9 ; 12.945,51.55 12.875,51.48 12.875,49.49 11.45,48.065 11.45,44.54 12.08,43.91 13.025,43.91 ; v1(15.175,36.749) 16.649,36.749 25.175,45.275 33.25,45.275 34.775,46.8 v1(34.775,48) ; 15.225,44.86 v1(19.475,44.86) 21.06,44.86 22.525,46.325 v1(29.375,46.325) ; 15.225,45.81 v1(15.225,47.428) ; 15.455,51.55 16.25,51.55 20.2,55.5 v1(20.2,57.3) v1@20.3,57.4 ; v1(18.495,33.2) 19.2,33.2 20.9,31.5 ; v1(21.7,48.67) 25.29,48.67 28.62,52 v1(30.34,52) ; v1(23.47,49.94) 23.52,49.99 23.52,50.869 v1(29.001,56.35) ; v1(24.675,42.35) 31.8,42.35 36.03,46.58 v1(36.03,47.95) ; v1(32.925,46.675) 32.327,47.273 19.527,47.273 v1(19.475,47.325) 19.475,49.275 29.849,59.649 v1(32.983,59.649) ; v1(34.5,41.2) 34.5,43.65 v1(37,46.15) ; 35.2,29.6 35.35,29.6 35.573,29.823 35.573,29.973 38.3,32.7 v1(38.3,36.493) ; v1(38.3,40.85) 38.3,42.547 38.572,42.819 v1(38.572,47.775)
  other v2: 6.2,1.809 45.2,1.809 6.2,58.13 45.2,58.13

## Polygon pours and split planes (outlines as drawn)
GND on Top Layer "NONET_L-01_P-001" (solid, remove dead copper, pour order 1): -7.5,64.1 55.4,64.1 55.4,-11.95 -7.5,-11.95
GND on Bottom Layer "NONET_L-01_P-001" (solid, pour order 2): -7.5,64.1 55.4,64.1 55.4,-11.95 -7.5,-11.95

## Silkscreen, mask and mechanical layers (free items; w line width, h text height)
Mechanical 1:
  the board outline again, w0.254